# Altium PCB PCB.PcbDoc
Units mm, origin at the board's own origin, x right, y up, seen from the top; angles counter-clockwise.
Board outline 41 x 58.5 mm, 2 copper layers (Top Layer, Bottom Layer); 36 components, 22 nets, 143 pads, 41 vias.
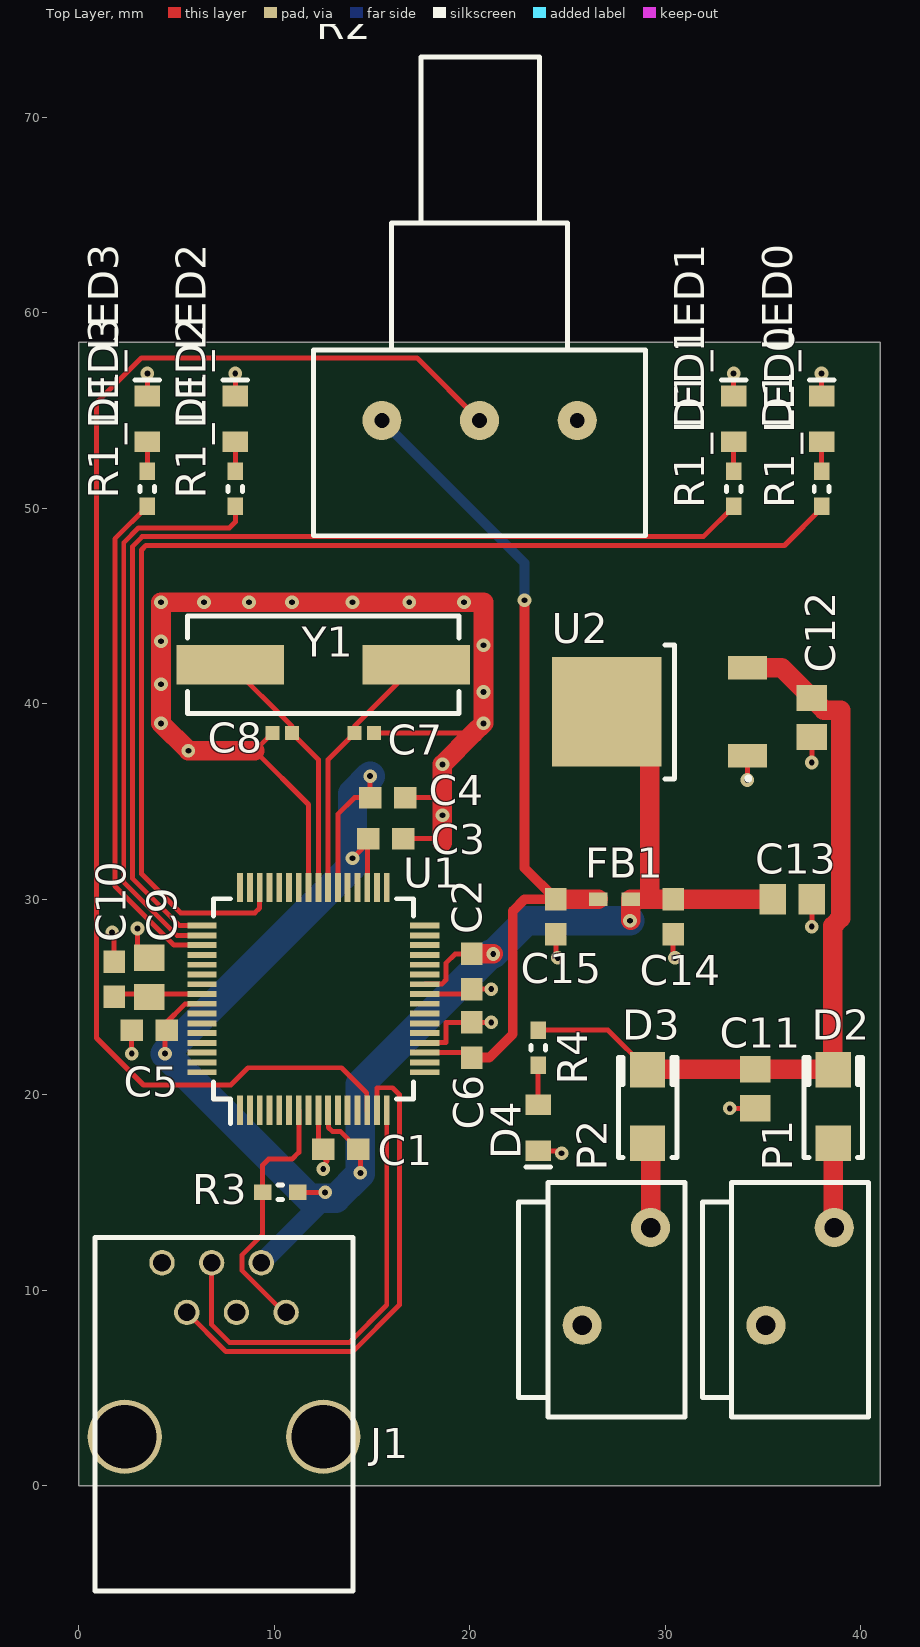
[diagram p0: Top Layer view]
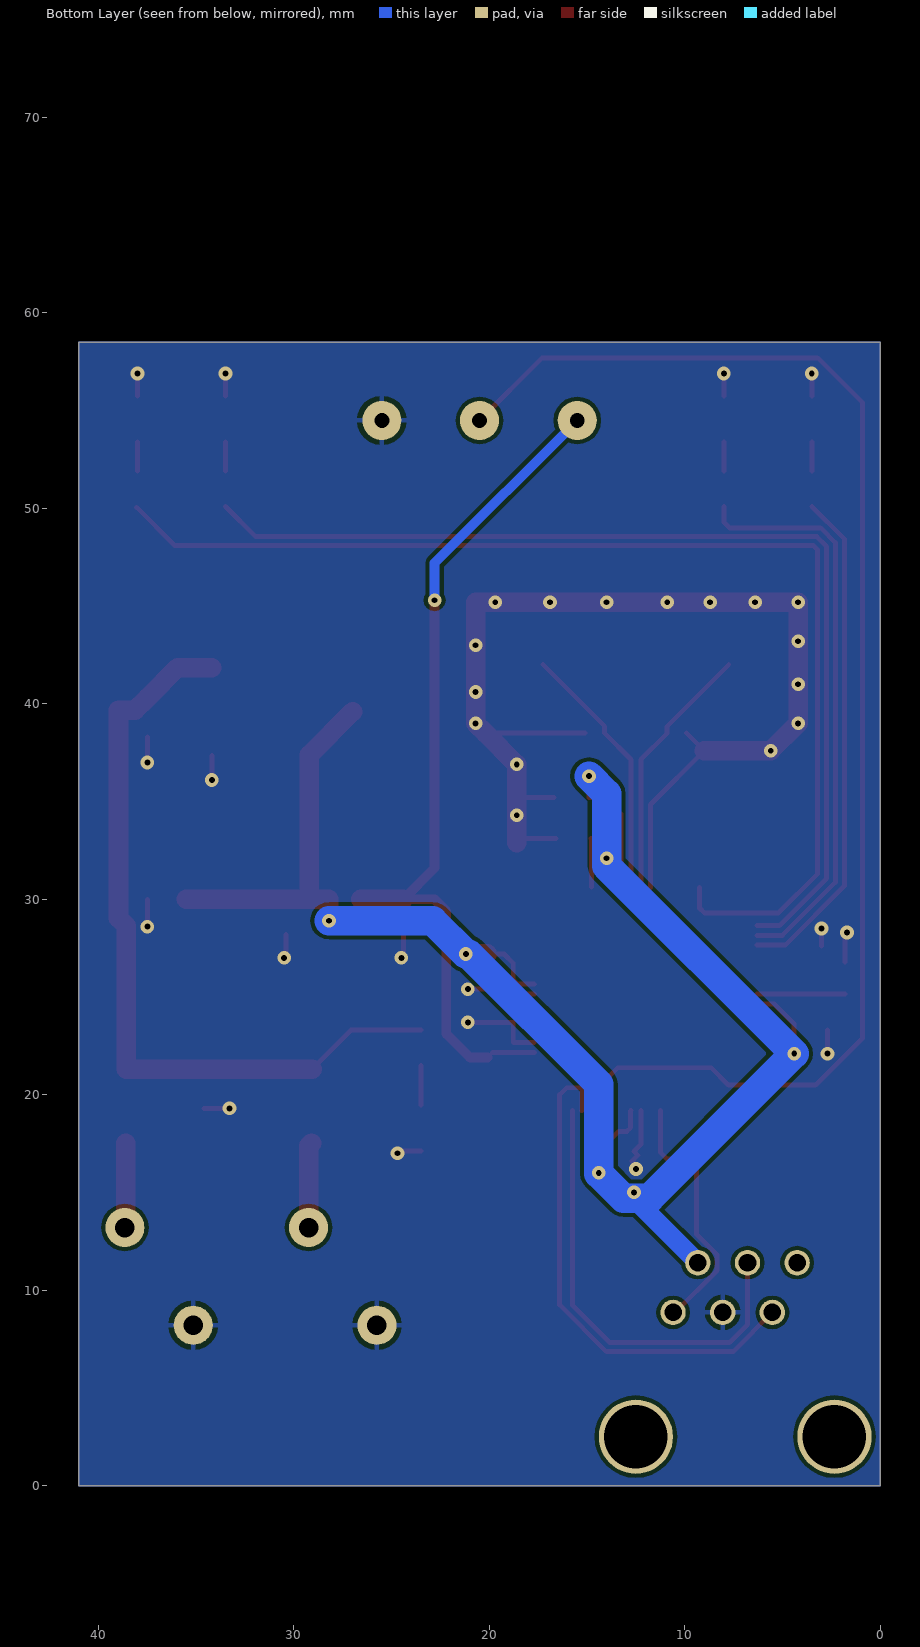
[diagram p1: Bottom Layer view, seen from below]

## Layer stack, top to bottom
Top Solder: solder mask 0.0102, Solder Resist, Dk 3.5
Top Layer: signal copper 0.0356
Dielectric 1: dielectric 0.32, FR-4, Dk 4.8
Bottom Layer: signal copper 0.0356
Bottom Solder: solder mask 0.0102, Solder Resist, Dk 3.5

## Board outline
0,0 41,0 41,58.5 0,58.5

## Design rules (kind name [scope] priority, off if disabled: settings)
Clearance [All] p1: gap=0.2
HoleSize [All] p1: absolutevalues=TRUE maxlimit=2.54 minlimit=0.3 maxpercent=80.000 minpercent=20.000
PolygonConnect PolygonDirectConnectVias [IsVia] p1: connectstyle=Direct reliefconductorwidth=0.254 reliefentries=4 polygonreliefangle="90 Angle" airgapwidth=0.254
PolygonConnect [All] p2: connectstyle=Relief reliefconductorwidth=0.254 reliefentries=4 polygonreliefangle="90 Angle" airgapwidth=0.254
RoutingVias [All] p1: holewidth=0.711 width=1.27 viastyle="Through Hole" minholewidth=0.3 minwidth=0.7 maxholewidth=0.711 maxwidth=1.27
SolderMaskExpansion [All] p1: expansion=0.102
UnpouredPolygon [All] p1: allowunpoured=FALSE
Width [All] p1: maxlimit=1.5 minlimit=0.2 preferedwidth=0.2
28 further rules are at their usual default settings.

## Classes and differential pairs
channel class LED: LED0 LED1 LED2 LED3
net class LED[0..3]: LED0 LED1 LED2 LED3
component class POWER: C11 C12 C13 C14 C15 D2 D3 D4 FB1 P1 P2 R4 U2
component class PIC: C1 C2 C3 C4 C5 C6 C7 C8 C9 C10 J1 R3 U1 Y1
component class LED3: D1_LED3 R1_LED3
component class LED2: D1_LED2 R1_LED2
component class LED1: D1_LED1 R1_LED1
component class LED0: D1_LED0 R1_LED0

## Components (designator, comment, footprint, x,y, rotation, side; value= is the part's Value field where it differs from the comment)
C1 "100nF" CAPC1608N 13.4,17.2 r0 top
C2 "100nF" CAPC1608N 20.1,26.3 r90 top
C3 "100nF" CAPC1608N 15.7,33.1 r180 top
C4 "100nF" CAPC1608N 15.8,35.2 r180 top
C5 "100nF" CAPC1608N 3.6,23.3 r0 top
C6 "100nF" CAPC1608N 20.1,22.8 r270 top
C7 "20pF" CAPC1005N 14.6,38.5 r0 top
C8 "20pF" CAPC1005N 10.4,38.5 r180 top
C9 "10uF" CAPC2012N 3.6,26 r270 top
C10 "1uF" CAPC1608N 1.8,25.9 r270 top
C11 "10uF" CAPC2012N 34.6,20.3 r90 top
C12 "10uF" CAPC2012N 37.5,39.3 r90 top
C13 "10uF" CAPC2012N 36.5,30 r180 top
C14 "1uF" CAPC1608N 30.4,29.1 r90 top
C15 "100nF" CAPC1608N 24.4,29.1 r90 top
D1_LED0 "Green LED" "LED 0805" 38,54.575 r90 top (schematic designator D1)
D1_LED1 "Green LED" "LED 0805" 33.5,54.575 r90 top (schematic designator D1)
D1_LED2 "Green LED" "LED 0805" 8,54.575 r90 top (schematic designator D1)
D1_LED3 "Green LED" "LED 0805" 3.5,54.575 r90 top (schematic designator D1)
D2 "GF1A" SMA/DO-214AC_21 38.6,19.4 r90 top
D3 "GF1A" SMA/DO-214AC_21 29.1,19.4 r90 top
D4 "Green LED" "LED 0805" 23.5,18.3 r270 top
FB1 "600r" INDC1608AN 27.4,30 r180 top
J1 "Program / Debug" "RJ12_90  1-215876-3" 12.5,2.5 r270 top
P1 "12V Main" PHOENIX_1985195 36.9,10.7 r0 top
P2 "12V Battery" PHOENIX_1985195 27.5,10.7 r0 top
R1_LED0 "330r" RESC1608N 38,51 r270 top (schematic designator R1)
R1_LED1 "330r" RESC1608N 33.5,51 r270 top (schematic designator R1)
R1_LED2 "330r" RESC1608N 8,51 r270 top (schematic designator R1)
R1_LED3 "330r" RESC1608N 3.5,51 r270 top (schematic designator R1)
R2 "1K" PDB181-K415K-102A2 20.5,54.5 r0 top
R3 "4.7k" RESC1608N 10.3,15 r0 top
R4 "470r" RESC1608N 23.5,22.4 r90 top
U1 "PIC32MX764F128H-I/PT" QFP50P1200X1200X120-64 12,24.9 r90 top
U2 "AP1117" TD03B_N 27,39.6 r90 top
Y1 "8MHz" "HC49/4H SMX CRYSTAL" 12.5,42 r0 top

## Footprints (in the part's own frame and the unit in brackets; to place one, negate y for a bottom-side part, rotate by r counter-clockwise, add the part's x,y. Pads: shape width x height; smd on the part's side, far side on the other; paste and mask are expansions set on the pad)
CAPC1005N [mm]
  rect 0.72x0.72 smd: 1(-0.5,0) 2(0.5,0)
CAPC1608N [mm]
  rect 1.15x1.1 smd: 1(-0.9,0) 2(0.9,0)
CAPC2012N [mm]
  rect 1.35x1.55 smd: 1(-1,0) 2(1,0)
"HC49/4H SMX CRYSTAL" [mm]
  rect 5.5x2 smd: 1(-4.75,0) 2(4.75,0)
  silkscreen extent -6.95,-2.5 6.95,2.5
INDC1608AN [mm]
  rect 0.95x0.7 smd: 1(-0.825,0) 1(-0.825,0) 2(0.825,0)
"LED 0805" [mm]
  rect 1.05x1.3 smd: 1(-1.175,0) 2(1.175,0)
  silkscreen extent 2,-0.63 2,0.63
PDB181-K415K-102A2 [mm]
  round 2 hole 0.762: 1(-5,0) 2(0,0) 3(5,0)
  silkscreen extent -8.5,-5.9 8.5,18.6
PHOENIX_1985195 [mm]
  round 2 hole 1: 1(1.75,2.5) 2(-1.75,-2.5)
  silkscreen extent -5,-7.2 3.5,4.8
QFP50P1200X1200X120-64 [mm]
  rect 1.5x0.3 smd: 1(-5.7,3.75) 2(-5.7,3.25) 3(-5.7,2.75) 4(-5.7,2.25) 5(-5.7,1.75) 6(-5.7,1.25) 7(-5.7,0.75) 8(-5.7,0.25) 9(-5.7,-0.25) 10(-5.7,-0.75) 11(-5.7,-1.25) 12(-5.7,-1.75) 13(-5.7,-2.25) 14(-5.7,-2.75) 15(-5.7,-3.25) 16(-5.7,-3.75) 33(5.7,-3.75) 34(5.7,-3.25) 35(5.7,-2.75) 36(5.7,-2.25) 37(5.7,-1.75) 38(5.7,-1.25) 39(5.7,-0.75) 40(5.7,-0.25) 41(5.7,0.25) 42(5.7,0.75) 43(5.7,1.25) 44(5.7,1.75) 45(5.7,2.25) 46(5.7,2.75) 47(5.7,3.25) 48(5.7,3.75)
  rect 0.3x1.5 smd: 17(-3.75,-5.7) 18(-3.25,-5.7) 19(-2.75,-5.7) 20(-2.25,-5.7) 21(-1.75,-5.7) 22(-1.25,-5.7) 23(-0.75,-5.7) 24(-0.25,-5.7) 25(0.25,-5.7) 26(0.75,-5.7) 27(1.25,-5.7) 28(1.75,-5.7) 29(2.25,-5.7) 30(2.75,-5.7) 31(3.25,-5.7) 32(3.75,-5.7) 49(3.75,5.7) 50(3.25,5.7) 51(2.75,5.7) 52(2.25,5.7) 53(1.75,5.7) 54(1.25,5.7) 55(0.75,5.7) 56(0.25,5.7) 57(-0.25,5.7) 58(-0.75,5.7) 59(-1.25,5.7) 60(-1.75,5.7) 61(-2.25,5.7) 62(-2.75,5.7) 63(-3.25,5.7) 64(-3.75,5.7)
  silkscreen extent -6.38,-5.13 5.13,5.13
RESC1608N [mm]
  rect 0.9x0.8 smd: 1(-0.9,0) 2(0.9,0)
  silkscreen extent -0.13,-0.38 0.13,0.38
"RJ12_90  1-215876-3" [mm]
  round 1.3 hole 0.9: 1(-6.36,-1.9) 2(-8.9,-3.17) 3(-6.36,-4.44) 4(-8.9,-5.71) 5(-6.36,-6.98) 6(-8.9,-8.25)
  round 3.8 hole 3.25: 11(0,0) 11(0,-10.16)
  silkscreen extent -10.2,-11.68 7.9,1.52
SMA/DO-214AC_21 [mm]
  rect 1.82x1.8 smd: 1(-1.875,0) 2(1.875,0)
  silkscreen extent -2.63,-1.5 2.5,1.5
TD03B_N [mm]
  rect 1.2x2 smd: 1(-2.25,-7.2) 3(2.25,-7.2)
  rect 5.6x5.6 smd: 2(0,0)
  silkscreen extent -3.5,-7.33 3.4,-3

## Part data
C1 C2 C3 C4 C5 C6 C7 C8 C9 C10 C11 C12 C13 C14 C15: library part Cap, "Capacitor"
D1_LED0 D1_LED1 D1_LED2 D1_LED3: library part LED0, "Typical INFRARED GaAs LED"
D2 D3: library part Diode, "Default Diode"
D4: library part LED2, "Typical RED, GREEN, YELLOW, AMBER GaAs LED"
FB1: library part Inductor, "Inductor"
J1: library part "Header 6", "Header, 6-Pin"
P1 P2: library part "Header 2", "Header, 2-Pin"
R1_LED0 R1_LED1 R1_LED2 R1_LED3 R3 R4: library part Res1, "Resistor"
R2: library part RPot, "Potentiometer"
U1: "PIC32MX764F128H"
U2: "1A LDO, 18V input, DPAK"
Y1: library part XTAL, "Crystal Oscillator"

## Via types
v1: diameter 0.7, hole 0.3, Top Layer to Bottom Layer, 41 vias

## Nets (pads, with @x,y where several pads share a name; then routed paths per layer and width w, separated by ;. In a path a pad name is that pad's centre, name@x,y a point inside that pad or via, vN(x,y) a via of type N, cw(c..) or ccw(c..) an arc to the next point about the centre after c; other vN are vias at no path point)
ALIM: D2.1 P1.1 | length 4.3
  Top Layer w1: D2.1 38.6,13.25 P1.1
BATTERY: D3.1 P2.1 | length 4.6
  Top Layer w0.254: P2.1@29.1,13.35 P2.1
  Top Layer w1: D3.1 29.25,17.375 P2.1
GND: C1.1 C2.1 C3.1 C4.1 C5.1 C6.1 C7.2 C8.2 C9.1 C10.1 C11.1 C12.1 C13.1 C14.1 C15.1 D1_LED0.2 D1_LED1.2 D1_LED2.2 D1_LED3.2 D4.2 J1.3 P1.2 P2.2 R2.3 U1.9 U1.20 U1.25 U1.41 U2.1 | length 87.1
  Top Layer w0.254: C10.1 v1@1.8,28.2 ; v1(2.7,22.1) C5.1 ; C9.1@3,27.6 v1(3,28.5) ; D1_LED3.2 v1(3.5,56.9) ; D1_LED2.2 v1(8,56.9) ; C8.2 9,37.6 11.75,34.85 U1.41 ; U1.9 12.25,17.45 12.6,17.1 12.4,16.9 12.7,16.6 12.5,16.4 v1(12.5,16.2) ; C7.2 20.2,38.5 ; C3.1 18.4,33.1 ; C4.1 18.6,35.2 ; U1.25 C2.1@19.85,25.15 ; U1.20@17.723,22.673 18.777,22.673 18.777,23.682 18.795,23.7 C6.1 v1(21.1,23.7) ; C2.1 v1(21.1,25.4) ; D4.2 v1@24.575,17.125 ; v1@24.4,27.1 C15.1 ; v1@30.4,27.1 C14.1 ; v1(33.3,19.3) C11.1 ; D1_LED1.2 v1(33.5,56.9) ; v1(34.2,36.1) U2.1 ; v1(37.5,28.6) C13.1 ; v1(37.5,37) C12.1 ; D1_LED0.2 v1(38,56.9)
  Top Layer w1: 9,37.6 v1(5.6,37.6) v1(4.2,39) v1(4.2,45.2) 20.7,45.2 v1(20.7,43) v1(20.7,40.6) v1(20.7,39) 20.2,38.5 v1(18.6,36.9) 18.6,35.2 v1(18.6,34.3) 18.6,32.9
  other v1: 24.7,17 24.5,27 30.5,27 1.7,28.3 4.2,41 4.2,43.2 6.4,45.2 8.7,45.2 10.9,45.2 14,45.2 16.9,45.2 19.7,45.2
LED0: R1_LED0.2 U1.46 | length 60.4
  Top Layer w0.254: U1.46 9.25,29.55 9,29.3 5.2,29.3 3.2,31.3 3.2,47.874 3.426,48.1 36.1,48.1 R1_LED0.2@38.05,50.05
LED1: R1_LED1.2 U1.49 | length 53.2
  Top Layer w0.254: U1.49 5.15,28.65 2.746,31.054 2.746,48.062 3.238,48.554 31.954,48.554 R1_LED1.2
LED2: R1_LED2.2 U1.50 | length 29.5
  Top Layer w0.254: U1.50 5.008,28.15 2.292,30.866 2.292,48.25 3.05,49.008 7.708,49.008 8,49.3 R1_LED2.2
LED3: R1_LED3.2 U1.51 | length 25.8
  Top Layer w0.254: R1_LED3.2 1.838,48.438 1.838,30.678 4.866,27.65 U1.51
MCLR: J1.1 R3.1 U1.7 | length 13.2
  Top Layer w0.254: J1.1 10.488,8.86 8.353,10.995 8.353,11.805 9.4,12.852 R3.1 9.4,16.4 9.7,16.7 10.9,16.7 11.25,17.05 U1.7
NetC9_2: C9.2 C10.2 U1.56 | length 4.5
  Top Layer w0.254: C10.2@1.8,25.15 U1.56
NetD1_LED0_1: D1_LED0.1 R1_LED0.1 | length 1.5
  Top Layer w0.254: R1_LED0.1 D1_LED0.1
NetD1_LED1_1: D1_LED1.1 R1_LED1.1 | length 1.5
  Top Layer w0.254: R1_LED1.1 D1_LED1.1
NetD1_LED2_1: D1_LED2.1 R1_LED2.1 | length 1.5
  Top Layer w0.254: R1_LED2.1 D1_LED2.1
NetD1_LED3_1: D1_LED3.1 R1_LED3.1 | length 1.5
  Top Layer w0.254: R1_LED3.1 D1_LED3.1
NetD4_1: D4.1 R4.1 | length 2
  Top Layer w0.254: D4.1 R4.1
NetR2_2: R2.2 U1.14 | length 71
  Top Layer w0.254: U1.14@14.727,19.2 14.727,20.085 13.435,21.377 8.652,21.377 7.773,20.498 3.302,20.498 0.9,22.9 0.9,55.4 3.2,57.7 17.3,57.7 R2.2
PGC: J1.5 U1.15 | length 25.9
  Top Layer w0.254: J1.5 7.526,6.854 14.012,6.854 16.4,9.242 16.4,20 16.046,20.354 15.25,20.354 U1.15 U1.15@15.273,19.177
PGD: J1.4 U1.16 | length 23.3
  Top Layer w0.254: J1.4 6.79,8.232 7.714,7.308 13.824,7.308 15.75,9.234 U1.16
V3P3: C1.2 C2.2 C3.2 C4.2 C5.2 C13.2 C14.2 FB1.1 J1.2 R3.2 U1.10 U1.26 U1.35 U1.38 U1.57 U2.2 | length 101.8
  Top Layer w0.254: v1(4.4,22.1) 4.4,23.612 5.438,24.65 U1.57 ; R3.2 v1(12.6,15) ; U1.10 12.773,19.177 12.773,18.315 12.965,18.123 13.377,18.123 14.4,17.1 v1(14.4,16) ; U1.38 13.25,34.35 14.1,35.2 C4.2 v1(14.9,36.3) ; v1(14,32.1) C3.2@14.773,32.873 ; U1.35@14.773,30.623 C3.2@14.773,32.873 ; C3.2 14.773,33.073 C3.2@14.773,32.873 ; U1.26 17.723,25.673 18.585,25.673 18.777,25.865 18.777,26.727 19.25,27.2 C2.2
  Top Layer w1: C2.2 v1(21.2,27.2) ; U2.2 29.213,37.387 29.213,30 ; v1@28.225,28.925 28.225,30 29.213,30 ; C14.2@30.2,30 29.213,30 ; C14.2 C13.2
  Bottom Layer w1: J1.2 v1@12.63,14.7
  Bottom Layer w1.5: v1(14.9,36.3) 14,35.4 v1(14,32.1) 14,31.7 v1(4.4,22.1) 11.8,14.7 12.63,14.7 13.138,14.7 14.4,15.962 v1(14.4,16) 14.4,20.538 21.062,27.2 v1(21.2,27.2) 22.9,28.9 v1(28.2,28.9)
V3P3A: C6.2 C15.2 FB1.2 R2.1 U1.19 | length 43.9
  Top Layer w0.254: U1.19 C6.2@19.85,22.15
  Top Layer w0.5: C6.2 21,21.9 22.2,23.1 22.2,29.4 22.8,30 C15.2 22.8,31.6 v1(22.8,45.3)
  Top Layer w1: C15.2 FB1.2
  Bottom Layer w0.5: R2.1 22.8,47.2 v1(22.8,45.3)
V5: C11.2 C12.2 D2.2 D3.2 R4.2 U2.3 | length 40.2
  Top Layer w0.254: R4.2 27.075,23.3 29.075,21.3 D3.2
  Top Layer w1: D3.2@29.075,21.3 38.575,21.3 38.575,28.635 38.975,29.035 38.975,39.675 38.125,39.675 C12.2 35.95,41.85 U2.3
X1: C7.1 U1.39 Y1.2 | length 13.3
  Top Layer w0.254: U1.39 12.75,37.15 C7.1 14.1,38.85 Y1.2
X2: C8.1 U1.40 Y1.1 | length 13.3
  Top Layer w0.254: Y1.1 10.9,38.85 C8.1 12.25,37.15 U1.40
pads on no net: J1.6 J1.11 U1.1 U1.2 U1.3 U1.4 U1.5 U1.6 U1.8 U1.11 U1.12 U1.13 U1.17 U1.18 U1.21 U1.22 U1.23 U1.24 U1.27 U1.28 U1.29 U1.30 U1.31 U1.32 U1.33 U1.34 U1.36 U1.37 U1.42 U1.43 U1.44 U1.45 U1.47 U1.48 U1.52 U1.53 U1.54 U1.55 U1.58 U1.59 U1.60 U1.61 U1.62 U1.63 U1.64

## Polygon pours and split planes (outlines as drawn)
GND on Bottom Layer "Top Overlay-No Net" (solid, remove dead copper, shelved, pour order 2): 0,58.5 41,58.5 41,0 0,0
GND on Bottom Layer "Top Overlay-No Net" (solid, remove dead copper, shelved, pour order 3): 0,0 41,0 41,58.5 0,58.5
GND on Bottom Layer "Top Overlay-No Net" (solid, remove dead copper, pour order 5): 0,58.5 41,58.5 41,0 0,0

## Silkscreen, mask and mechanical layers (free items; w line width, h text height)
board_outline:
  the board outline again, w0.254